# EAGLE board ArduSensor-Shield-V1 (EAGLE 6.0)
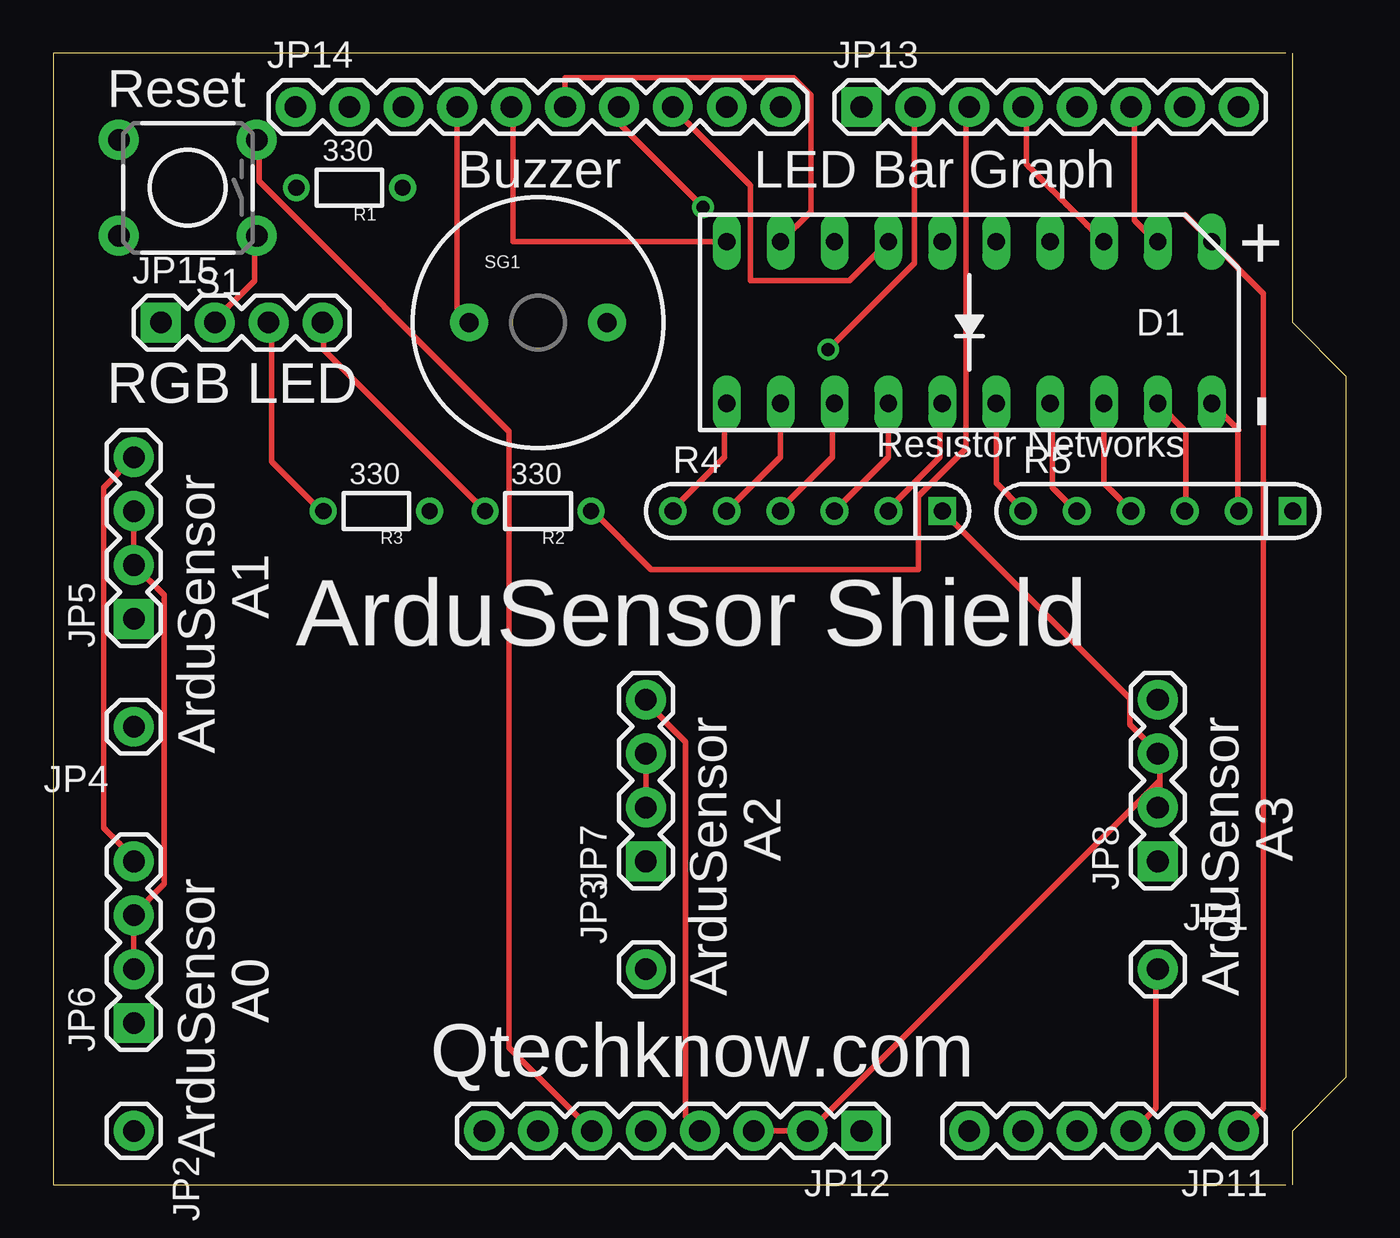
[diagram p0: board, top side]
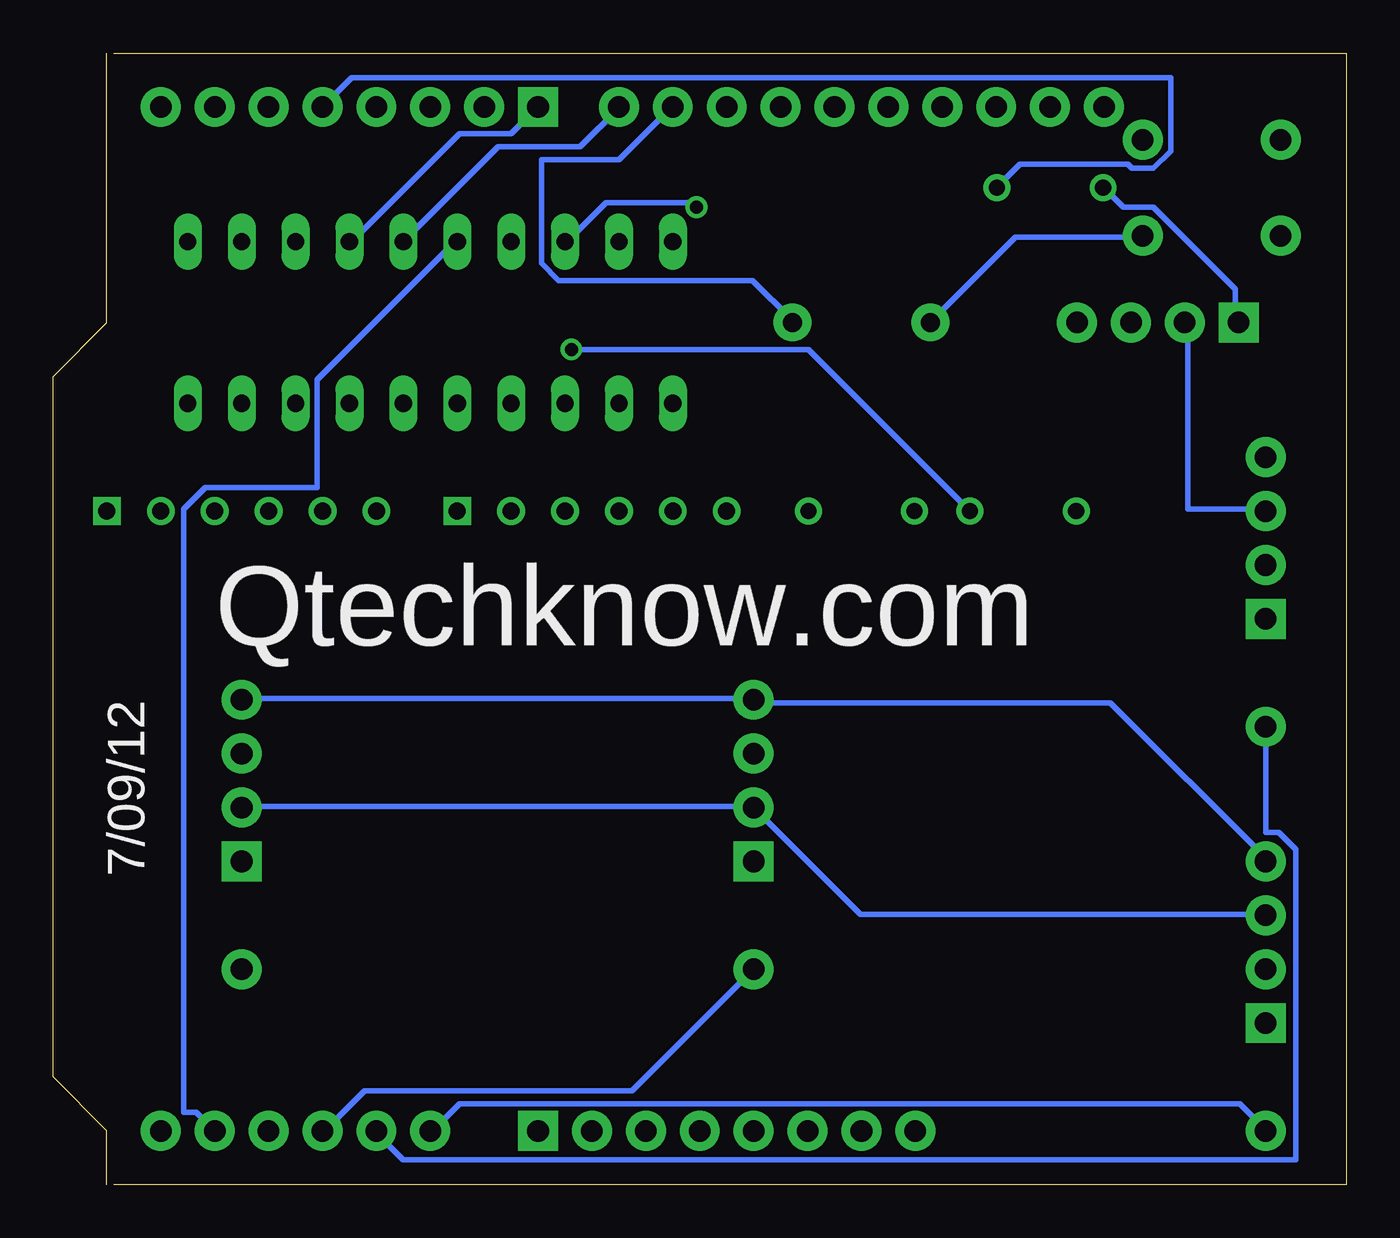
[diagram p1: board, bottom side, seen from below]

Size 60.96 x 53.34 mm. Coordinates in mm from the lower left corner, seen from the top.
Outline: 58.09,0 0,0 0,53.33 58.09,53.33
Outline: 58.42,0 58.42,2.54 60.96,5.08 60.96,38.1 58.42,40.64 58.42,53.34
Copper layers (1*16): Top 0.035mm / dielectric 1.5mm / Bottom 0.035mm
Design rules: minimum track width 10mil, minimum drill 24mil, track to track 8mil, track to pad 8mil, pad to pad 8mil, via to via 8mil, smd to smd 8mil, copper to edge 40mil, drill to drill 8mil, minimum pad ring 10mil, minimum via ring 8mil, stop-mask expansion 4mil, vias tented up to drill 0mil, thermal gap 10mil

## Footprints (pad centres in the part's own frame; a part is rotated, then mirrored left to right if it is on the bottom)
LED_BARGAPH_10 = drill 0.813 long: 1 -11.43,-3.81; 2 -8.89,-3.81; 3 -6.35,-3.81; 4 -3.81,-3.81; 5 -1.27,-3.81; 6 1.27,-3.81; 7 3.81,-3.81; 8 6.35,-3.81; 9 8.89,-3.81; 10 11.43,-3.81; 11 11.43,3.81; 12 8.89,3.81; 13 6.35,3.81; 14 3.81,3.81; 15 1.27,3.81; 16 -1.27,3.81; 17 -3.81,3.81; 18 -6.35,3.81; 19 -8.89,3.81; 20 -11.43,3.81
1X01 = drill 1.016 pad 1.88: 1 0,0
1X04 = drill 1.016 pad 1.88 square: 1 0,0 | drill 1.016 pad 1.88: 2 2.54,0; 3 5.08,0; 4 7.62,0
1X06 = drill 1.016 pad 1.88: 1 0,0; 2 2.54,0; 3 5.08,0; 4 7.62,0; 5 10.16,0; 6 12.7,0
1X08 = drill 1.016 pad 1.88 square: 1 0,0 | drill 1.016 pad 1.88: 2 2.54,0; 3 5.08,0; 4 7.62,0; 5 10.16,0; 6 12.7,0; 7 15.24,0; 8 17.78,0
1X10 = drill 1.016 pad 1.88: 1 0,0; 2 2.54,0; 3 5.08,0; 4 7.62,0; 5 10.16,0; 6 12.7,0; 7 15.24,0; 8 17.78,0; 9 20.32,0; 10 22.86,0
1/6W-RES = drill 0.762: 1 -2.5,0; 2 2.5,0
RPACK-SIP-PTH-5 = drill 0.8 square: P$1 0,0 | drill 0.8: P$2 0,-2.54; P$3 0,-5.08; P$4 0,-7.62; P$5 0,-10.16; P$6 0,-12.7
TACTILE-PTH = drill 1.016 pad 1.88: 1 -3.251,2.261; 2 3.251,2.261; 3 -3.251,-2.261; 4 3.251,-2.261
BUZZER-12MM = drill 0.9 pad 1.778: + 3.25,0; - -3.25,0

## Placement (x,y rotation side)
D1  [LED_BARGAPH_10]  43.18,40.64 180 top
JP1  M01PTH  [1X01]  52.07,10.16 0 top
JP2  M01PTH  [1X01]  3.81,2.54 270 top
JP3  M01PTH  [1X01]  27.94,10.16 90 top
JP4  M01PTH  [1X01]  3.81,21.59 180 top
JP5  [1X04]  3.81,26.67 90 top
JP6  [1X04]  3.81,7.62 90 top
JP7  [1X04]  27.94,15.24 90 top
JP8  [1X04]  52.07,15.24 90 top
JP11  [1X06]  55.88,2.54 180 top
JP12  [1X08]  38.1,2.54 180 top
JP13  [1X08]  38.1,50.8 0 top
JP14  M10"  [1X10]  11.43,50.8 0 top
JP15  [1X04]  5.08,40.64 0 top
R1  [1/6W-RES]  13.97,46.99 180 top
R2  [1/6W-RES]  22.86,31.75 180 top
R3  [1/6W-RES]  15.24,31.75 180 top
R4  [RPACK-SIP-PTH-5]  41.91,31.75 270 top
R5  [RPACK-SIP-PTH-5]  58.42,31.75 270 top
S1  SWITCH-MOMENTARY-2PTH  [TACTILE-PTH]  6.35,46.99 180 top
SG1  BUZZERPTH  [BUZZER-12MM]  22.86,40.64 0 top

## Library data of the parts
D1 = SFE LED
JP1-JP8 JP11-JP15 = SFE Connectors
R1-R5 = SFE Passives
S1 SG1 = SFE Electromechanical

## Nets
5V: JP5.4 JP6.4 JP7.4 JP8.4 JP12.4
GND: JP5.2 JP5.3 JP6.2 JP6.3 JP7.2 JP7.3 JP8.2 JP8.3 JP12.2 JP12.3 JP14.4 JP15.2 R4.P$1 S1.1 SG1.-
N$1: D1.5 JP14.10
N$2: JP13.5 R1.1
N$3: JP13.2 R3.1
N$4: JP13.3 R2.1
N$5: JP14.9 SG1.+
N$7: D1.7 JP14.8
N$9: JP15.1 R1.2
N$10: JP2.1 JP11.6
N$11: JP4.1 JP11.5
N$12: JP1.1 JP11.3
N$13: JP15.4 R2.2
N$14: D1.6 JP11.2
N$15: JP3.1 JP11.4
N$16: D1.9 JP14.6
N$17: D1.11 R4.P$6
N$18: D1.12 R4.P$5
N$19: D1.13 R4.P$4
N$20: D1.14 R4.P$3
N$21: D1.15 R4.P$2
N$22: D1.10 JP14.5
N$23: D1.16 R5.P$6
N$24: D1.17 R5.P$5
N$25: D1.18 R5.P$4
N$26: D1.19 R5.P$3
N$27: D1.20 R5.P$2
N$28: JP15.3 R3.2
N$29: D1.3 JP13.4
N$30: D1.2 JP13.6
N$31: D1.1 JP11.1
N$32: D1.4 JP13.1
N$36: JP12.6 S1.3
N$40: D1.8 JP14.7

## Tracks (layer width: path | path; a pad name or v marks a point on that pad's centre or on a via)
5V
  Top 0.254: JP5.4 2.39,32.87 2.39,16.81 3.81,15.39 JP6.4 | JP12.4 29.82,3.2 29.82,20.88 27.99,22.71 JP7.4
  Bottom 0.254: JP8.4 51.97,22.91 27.99,22.91 JP7.4 27.79,22.71 11.12,22.71 3.81,15.39 JP6.4
GND
  Top 0.254: JP12.3 JP12.2 35.71,2.59 52.17,19.05 | JP7.3 JP7.2 | R4.P$1 50.75,22.91 50.75,21.69 51.97,20.47 JP8.3 52.17,20.27 52.17,19.05 | 52.17,19.05 52.17,17.83 JP8.2 | JP14.4 19.05,41.2 19.46,40.79 SG1.- | JP15.2 7.67,40.79 9.5,42.62 9.5,44.65 S1.1 | JP6.2 JP6.3 3.81,12.75 5.23,14.17 5.23,27.79 JP5.2 JP5.3
  Bottom 0.254: JP8.2 51.97,17.83 27.99,17.83 JP7.2 22.91,12.75 3.81,12.75 JP6.3 | JP15.2 7.47,40.59 7.47,31.85 3.81,31.85 JP5.3 | SG1.- 19.46,40.79 15.6,44.65 9.7,44.65 S1.1
N$1
  Bottom 0.254: D1.5 39.98,48.92 36.12,48.92 34.29,50.75 JP14.10
N$2
  Bottom 0.254: JP13.5 46.89,52.17 8.28,52.17 8.28,48.72 9.09,47.9 10.11,47.9 10.31,48.11 15.39,48.11 16.41,47.09 R1.1
N$3  (via drill 0.61)
  Top 0.254: v36.53,39.37 40.59,43.43 40.59,50.75 JP13.2
  Bottom 0.254: v36.53,39.37 25.35,39.37 17.83,31.85 R3.1
N$4
  Top 0.254: R2.1 25.55,31.65 28.19,29.01 40.79,29.01 40.79,32.46 43.03,34.7 43.03,50.75 JP13.3
N$5
  Bottom 0.254: SG1.+ 26.16,40.79 27.99,42.62 37.14,42.62 37.95,43.43 37.95,48.31 34.29,48.31 31.85,50.75 JP14.9
N$7
  Top 0.254: D1.7 37.54,42.62 32.87,42.62 32.87,47.09 29.21,50.75 JP14.8
N$9
  Bottom 0.254: R1.2 11.33,46.89 10.52,46.08 9.09,46.08 5.23,42.22 5.23,40.79 JP15.1
N$10
  Bottom 0.254: JP2.1 3.81,2.59 5.03,3.81 41.81,3.81 43.03,2.59 JP11.6
N$11
  Bottom 0.254: JP4.1 3.81,16.61 3.2,16.61 2.39,15.8 2.39,1.17 44.45,1.17 45.67,2.39 JP11.5
N$12
  Top 0.254: JP11.3 50.95,2.59 51.97,3.61 51.97,10.11 JP1.1
N$13
  Top 0.254: R2.2 20.27,31.85 12.75,39.37 12.75,40.59 JP15.4
N$14
  Bottom 0.254: JP11.2 54.2,3.4 54.81,3.4 54.81,31.85 53.8,32.87 48.51,32.87 48.51,37.95 42.01,44.45 D1.6
N$15
  Bottom 0.254: JP3.1 33.68,4.42 46.28,4.42 48.11,2.59 JP11.4
N$16
  Top 0.254: D1.9 35.71,45.87 35.71,51.36 34.9,52.17 24.13,52.17 JP14.6
N$17
  Top 0.254: R4.P$6 29.21,31.85 31.65,34.29 31.65,36.73 D1.11
N$18
  Top 0.254: R4.P$5 34.29,34.29 D1.12
N$19
  Top 0.254: R4.P$4 34.29,31.85 36.73,34.29 36.73,36.73 D1.13
N$20
  Top 0.254: R4.P$3 39.37,34.29 D1.14
N$21
  Top 0.254: R4.P$2 39.37,31.85 41.81,34.29 41.81,36.73 D1.15
N$22
  Top 0.254: D1.10 21.69,44.45 21.69,50.75 JP14.5
N$23
  Top 0.254: D1.16 44.45,33.07 45.67,31.85 R5.P$6
N$24
  Top 0.254: R5.P$5 48.11,31.85 47.09,32.87 47.09,36.73 D1.17
N$25
  Top 0.254: D1.18 49.53,33.07 50.75,31.85 R5.P$4
N$26
  Top 0.254: D1.19 53.39,35.51 53.39,31.85 R5.P$3
N$27
  Top 0.254: D1.20 55.88,35.56 55.83,35.51 55.83,31.85 R5.P$2
N$28
  Top 0.254: R3.2 12.55,31.85 10.31,34.09 10.31,40.59 JP15.3
N$29
  Top 0.254: D1.3 45.87,48.11 45.87,50.75 JP13.4
N$30
  Top 0.254: D1.2 51.97,44.45 50.95,45.47 50.95,50.75 JP13.6
N$31
  Top 0.254: 53.34,45.72 D1.1 57.05,42.01 57.05,3.61 56.03,2.59 JP11.1
N$32
  Bottom 0.254: JP13.1 39.37,49.53 41.81,49.53 46.89,44.45 D1.4
N$36
  Top 0.254: JP12.6 21.49,6.45 21.49,35.51 9.7,47.3 9.7,49.12 S1.3
N$40  (via drill 0.61)
  Top 0.254: v30.63,46.08 26.77,49.94 26.77,50.75 JP14.7
  Bottom 0.254: v30.63,46.08 30.84,46.28 34.9,46.28 36.73,44.45 D1.8

## Text on the board
tPlace: Reset | 330 | Buzzer | LED Bar Graph | + | RGB LED | Resistor Networks | - | 330 | 330 | A1 | ArduSensor Shield | ArduSensor | A2 | A3 | ArduSensor | ArduSensor | A0 | Qtechknow.com | ArduSensor
bPlace: Qtechknow.com | 7/09/12